# EAGLE board head_band2 (EAGLE 8.6.0)
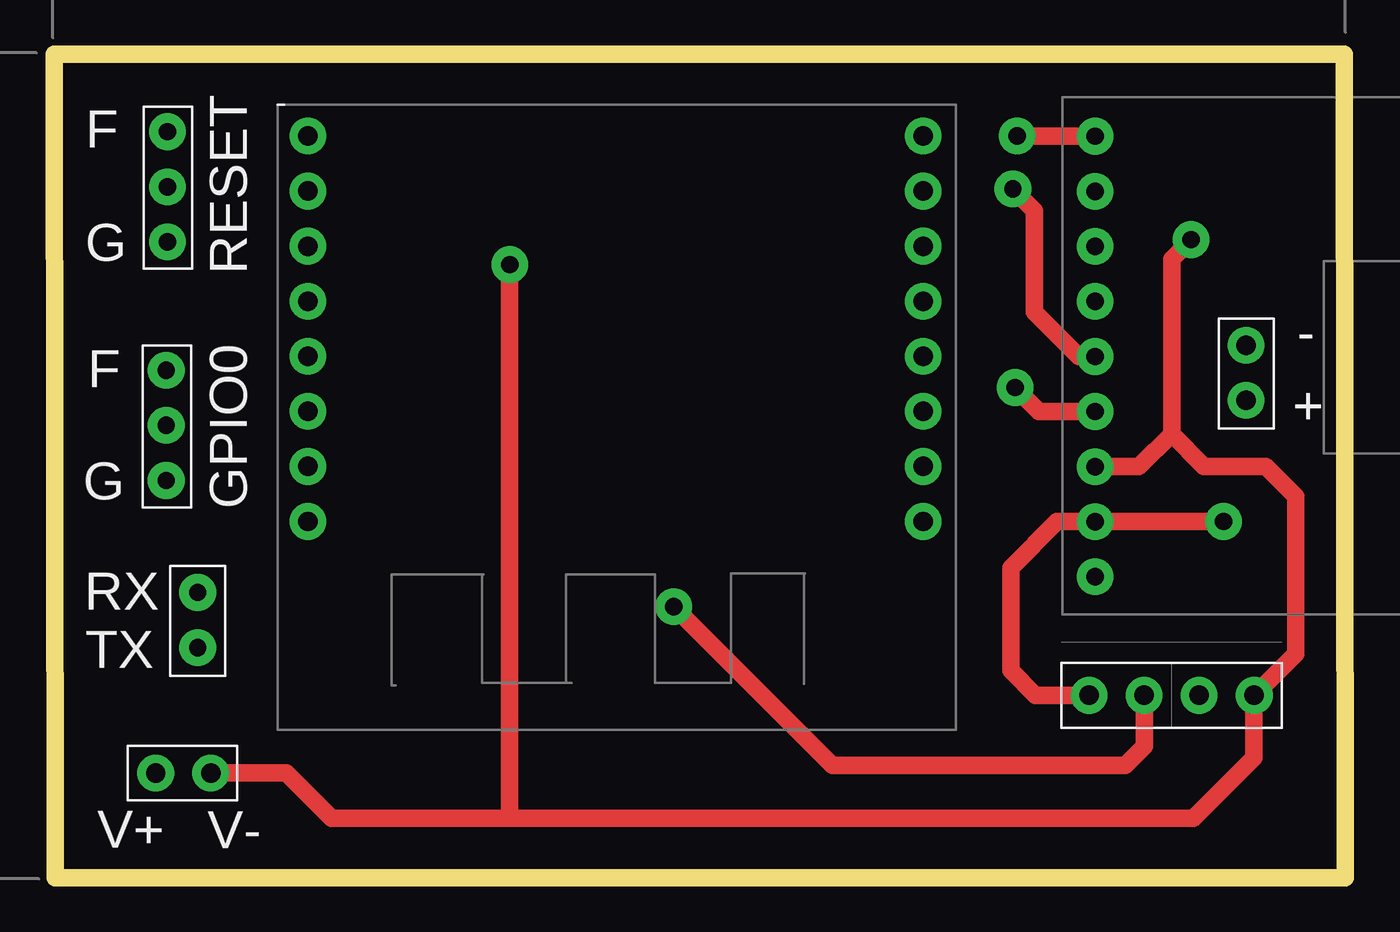
[diagram p0: board, top side]
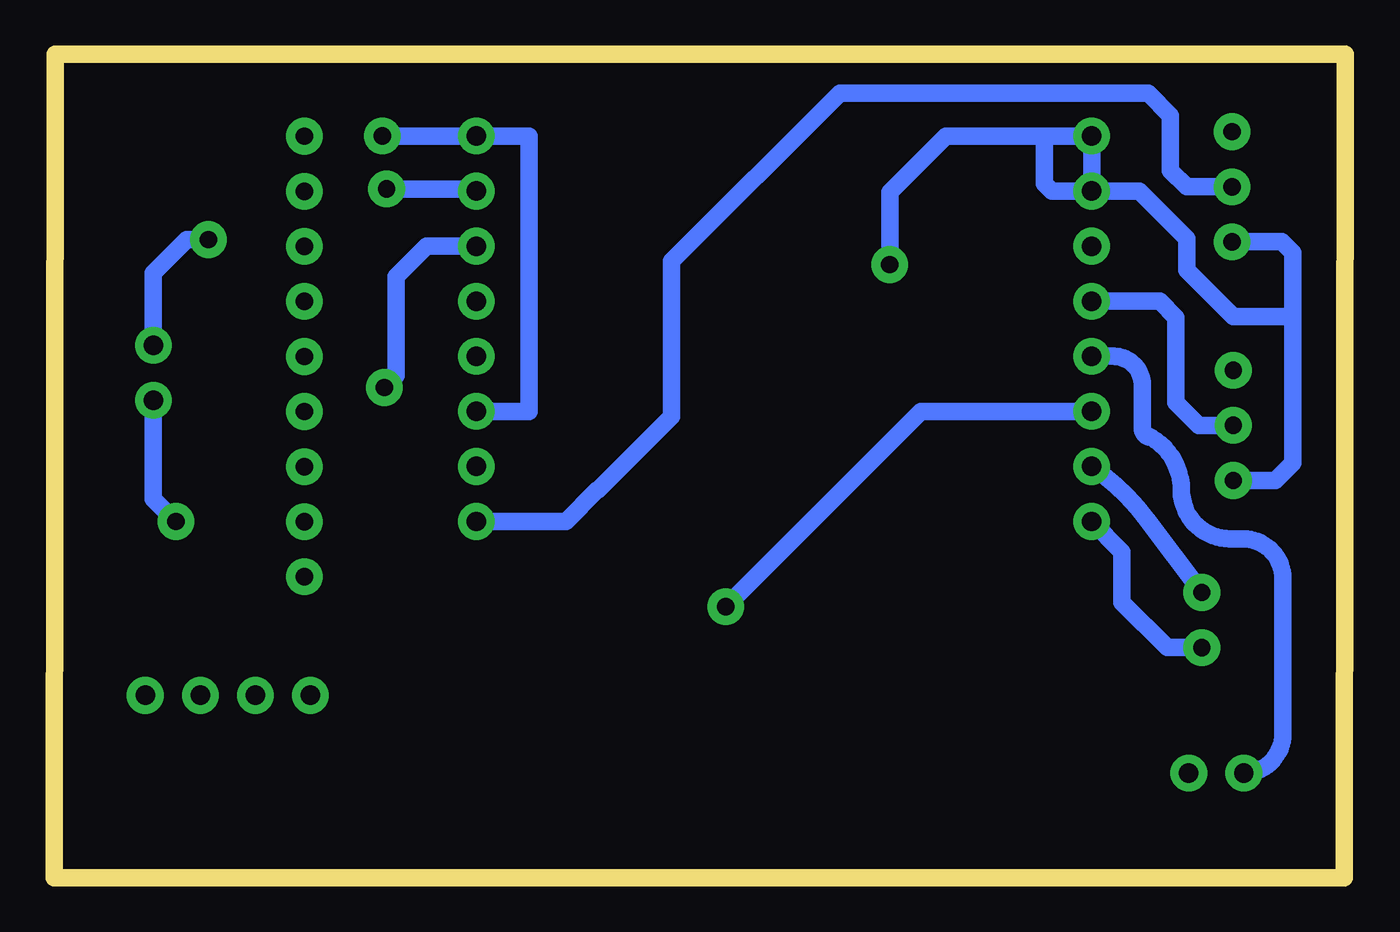
[diagram p1: board, bottom side, seen from below]

Size 59.8 x 38.15 mm. Coordinates in mm from the lower left corner, seen from the top.
Outline: 0,38.15 0.05,0 59.8,0 59.75,38.15 0,38.15
Copper layers (1*16): Top 0.035mm / dielectric 1.5mm / Bottom 0.035mm
Design rules "default": minimum track width 6mil, minimum drill 0.35mm, track to track 6mil, track to pad 6mil, pad to pad 6mil, via to via 6mil, smd to smd 6mil, copper to edge 40mil, drill to drill 6mil, minimum pad ring 10mil, minimum via ring 8mil, stop-mask expansion 4mil, vias tented up to drill 0mil, thermal gap 10mil

## Footprints (pad centres in the part's own frame; a part is rotated, then mirrored left to right if it is on the bottom)
ESP_WIFI_ME = drill 0.9 pad 1.7: P$1 -14.25,-11.35; P$2 -14.25,-8.8; P$3 -14.25,-6.25; P$4 -14.25,-3.7; P$5 -14.25,-1.15; P$6 -14.25,1.4; P$7 -14.25,3.95; P$8 -14.25,6.5; P$9 14.25,-11.35; P$10 14.25,-8.8; P$11 14.25,-6.25; P$12 14.25,-3.7; P$13 14.25,-1.15; P$14 14.25,1.4; P$15 14.25,3.95; P$16 14.25,6.5
GPS = drill 0.8 pad 1.7: P$1 -10.21,15.54; P$2 -7.66,15.54; P$3 -5.11,15.54; P$4 -2.56,15.54; P$5 -0.01,15.54; P$6 2.54,15.54; P$7 5.09,15.54; P$8 7.64,15.54; P$9 10.19,15.54
PIN_HEADER_2X1_GP = drill 0.9 pad 1.7: P$1 -1.31,0; P$2 1.24,0
PIN_HEADER_4X1_GP = drill 0.9 pad 1.7: P$1 -3.825,0; P$2 -1.275,0; P$3 1.275,0; P$4 3.825,0
PIN_HEADER_2X1_GP' = drill 0.8 pad 1.7: P$1 -1.31,0; P$2 1.24,0
PIN_HEADER_3X1_GP = drill 0.8 pad 1.7: P$1 0,0; P$2 2.55,0; P$3 -2.55,0

## Placement (x,y rotation side)
E$1  [ESP_WIFI_ME]  26,23 180 top
E$2  [GPS]  63.75,24.15 90 top
E$3  [PIN_HEADER_2X1_GP]  5.95,4.85 180 top
E$4  [PIN_HEADER_2X1_GP]  55.2,23.35 270 top
E$5  [PIN_HEADER_4X1_GP]  51.75,8.45 0 top
E$6  [PIN_HEADER_2X1_GP']  6.65,11.9 270 top
E$7  [PIN_HEADER_3X1_GP]  5.2,20.95 90 top
E$8  [PIN_HEADER_3X1_GP]  5.25,32 90 top

## Library data of the parts
E$1 = wifi
E$2 = GPS
E$3-E$5 = Pin_header
E$6-E$8 = custom components

## Nets
S$1: E$1.P$14 E$5.P$2
S$2: E$1.P$9 E$1.P$10 E$2.P$3 E$3.P$1 E$4.P$1 E$5.P$4 E$7.P$3 E$8.P$3
S$3: E$1.P$1 E$1.P$6 E$2.P$9
S$4: E$2.P$2 E$4.P$2 E$5.P$1
S$5: E$1.P$15 E$6.P$1
S$7: E$1.P$13 E$3.P$2
S$8: E$1.P$2 E$2.P$5
S$10: E$1.P$12 E$7.P$1
S$11: E$1.P$8 E$8.P$1
S$13: E$1.P$16 E$6.P$2
S$15: E$1.P$3 E$2.P$4

## Tracks (layer width: path | path; a pad name or v marks a point on that pad's centre or on a via)
S$1  (via drill 0.8 pad 1.7)
  Top 0.8: E$5.P$2 50.47,6.07 49.6,5.2 36.05,5.2 v28.7,12.55
  Bottom 0.8: v28.7,12.55 19.65,21.6 E$1.P$14
S$2  (via drill 0.8 pad 1.7)
  Top 0.8: v52.65,29.55 51.75,28.65 51.75,20.55 | E$2.P$3 50.24,19.04 51.75,20.55 | 51.75,20.55 53.25,19.05 56.1,19.05 57.5,17.65 57.5,10.38 E$5.P$4 55.55,8.43 55.55,5.55 52.75,2.75 21.15,2.75 | E$3.P$1 10.75,4.85 12.85,2.75 21.15,2.75 | v21.1,28.4 21.1,2.8 21.15,2.75
  Bottom 0.8: E$8.P$3 2.95,29.45 2.45,28.95 2.45,26 | E$7.P$3 3.25,18.4 2.45,19.2 2.45,26 | 2.45,26 5.2,26 7.35,28.15 7.35,29.6 9.55,31.8 E$1.P$10 | E$1.P$10 13.6,31.8 13.95,32.15 13.95,34.35 E$1.P$9 | E$1.P$10 E$1.P$9 | E$4.P$1 55.2,28 53.65,29.55 v52.65,29.55 | E$1.P$9 18.5,34.35 21.1,31.75 v21.1,28.4
S$3  (via drill 0.8 pad 1.7)
  Top 0.8: E$2.P$9 v44.61,34.34 v44.6,34.35
  Bottom 0.8: E$1.P$6 37.8,21.6 37.8,34.35 E$1.P$1 v44.6,34.35
S$4  (via drill 0.8 pad 1.7)
  Top 0.8: v54.15,16.5 53.8,16.5 53.79,16.49 E$2.P$2 46.44,16.49 44.3,14.35 44.3,9.6 45.45,8.45 E$5.P$1
  Bottom 0.8: E$4.P$2 55.2,17.55 v54.15,16.5
S$5
  Bottom 0.8: E$6.P$1 9.2,16.6 arc-18 E$1.P$15
S$7
  Bottom 0.8: E$3.P$2 arc-90 2.9,6.66 2.9,13.85 arc-90 4.75,15.7 5.35,15.7 arc90 7.6,17.95 arc-59 9,20.4 arc90 9.4,20.8 9.4,22.8 arc-90 10.75,24.15 E$1.P$13
S$8  (via drill 0.8 pad 1.7)
  Top 0.8: E$2.P$5 47.46,24.14 45.4,26.2 45.4,30.9 v44.4,31.9
  Bottom 0.8: v44.4,31.9 40.35,31.9 E$1.P$2
S$10
  Bottom 0.8: E$7.P$1 6.8,20.95 7.85,22 7.85,25.95 8.6,26.7 E$1.P$12
S$11
  Bottom 0.8: E$8.P$1 7.35,32 8.1,32.75 8.1,35.3 9.13,36.33 23.42,36.33 31.2,28.55 31.2,21.35 34.6,17.95 34.65,17.95 36.1,16.5 E$1.P$8
S$13
  Bottom 0.8: E$1.P$16 10.35,15.1 10.35,12.75 8.26,10.66 E$6.P$2
S$15  (via drill 0.8 pad 1.7)
  Top 0.8: E$2.P$4 45.61,21.59 v44.5,22.7
  Bottom 0.8: v44.5,22.7 43.95,23.25 43.95,27.85 42.55,29.25 E$1.P$3
(copper drawn outside any net)
  shapes: Top area x1

## Text on the board
tPlace: F | G | RESET | - | F | + | G | GPIO0 | RX | TX | V+ | V-